# Altium PCB Gimbal19_V1.PcbDoc
Units mil, origin at the board's own origin, x right, y up, seen from the top; angles counter-clockwise.
Board outline 2480.31 x 1968.5 mil, 2 copper layers (Top Layer, Bottom Layer); 67 components, 35 nets, 217 pads, 40 vias.
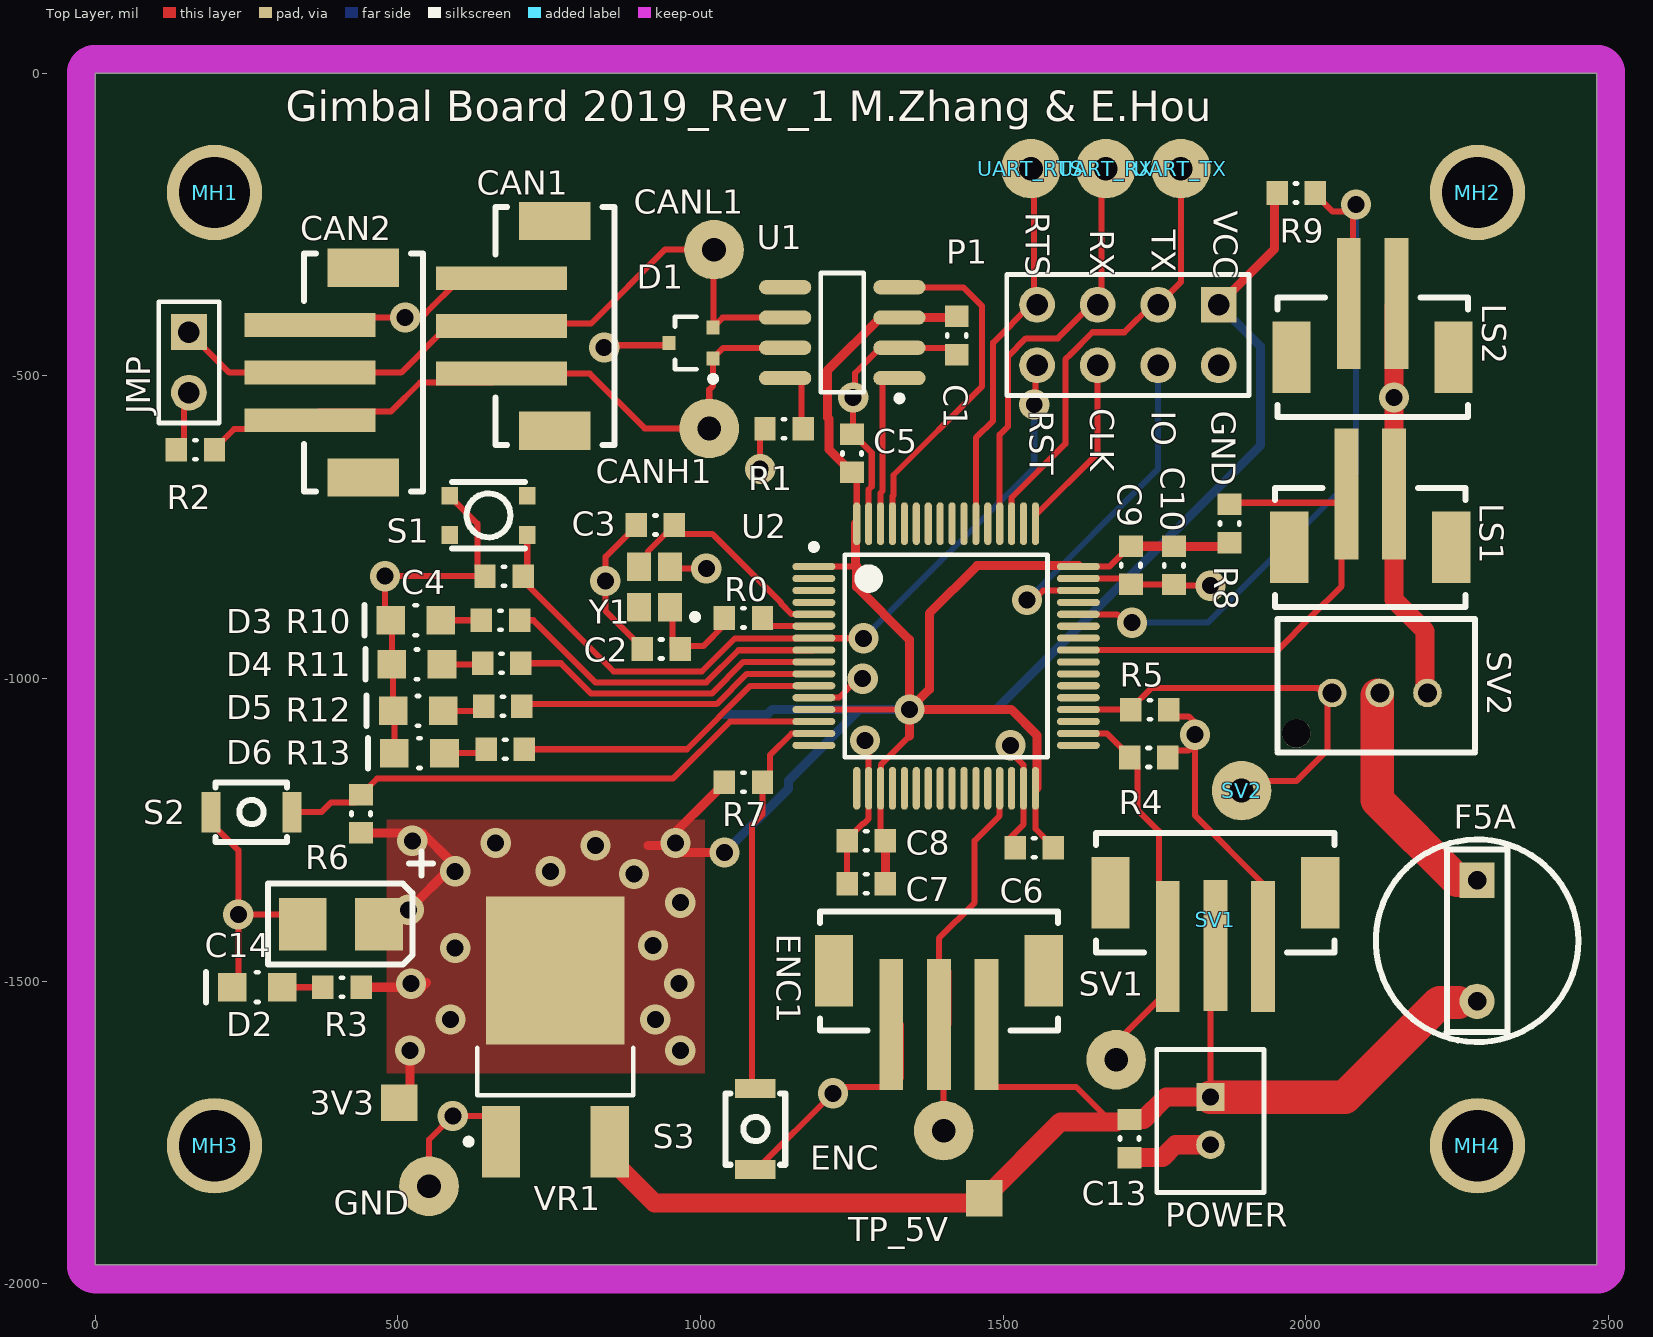
[diagram p0: Top Layer view]
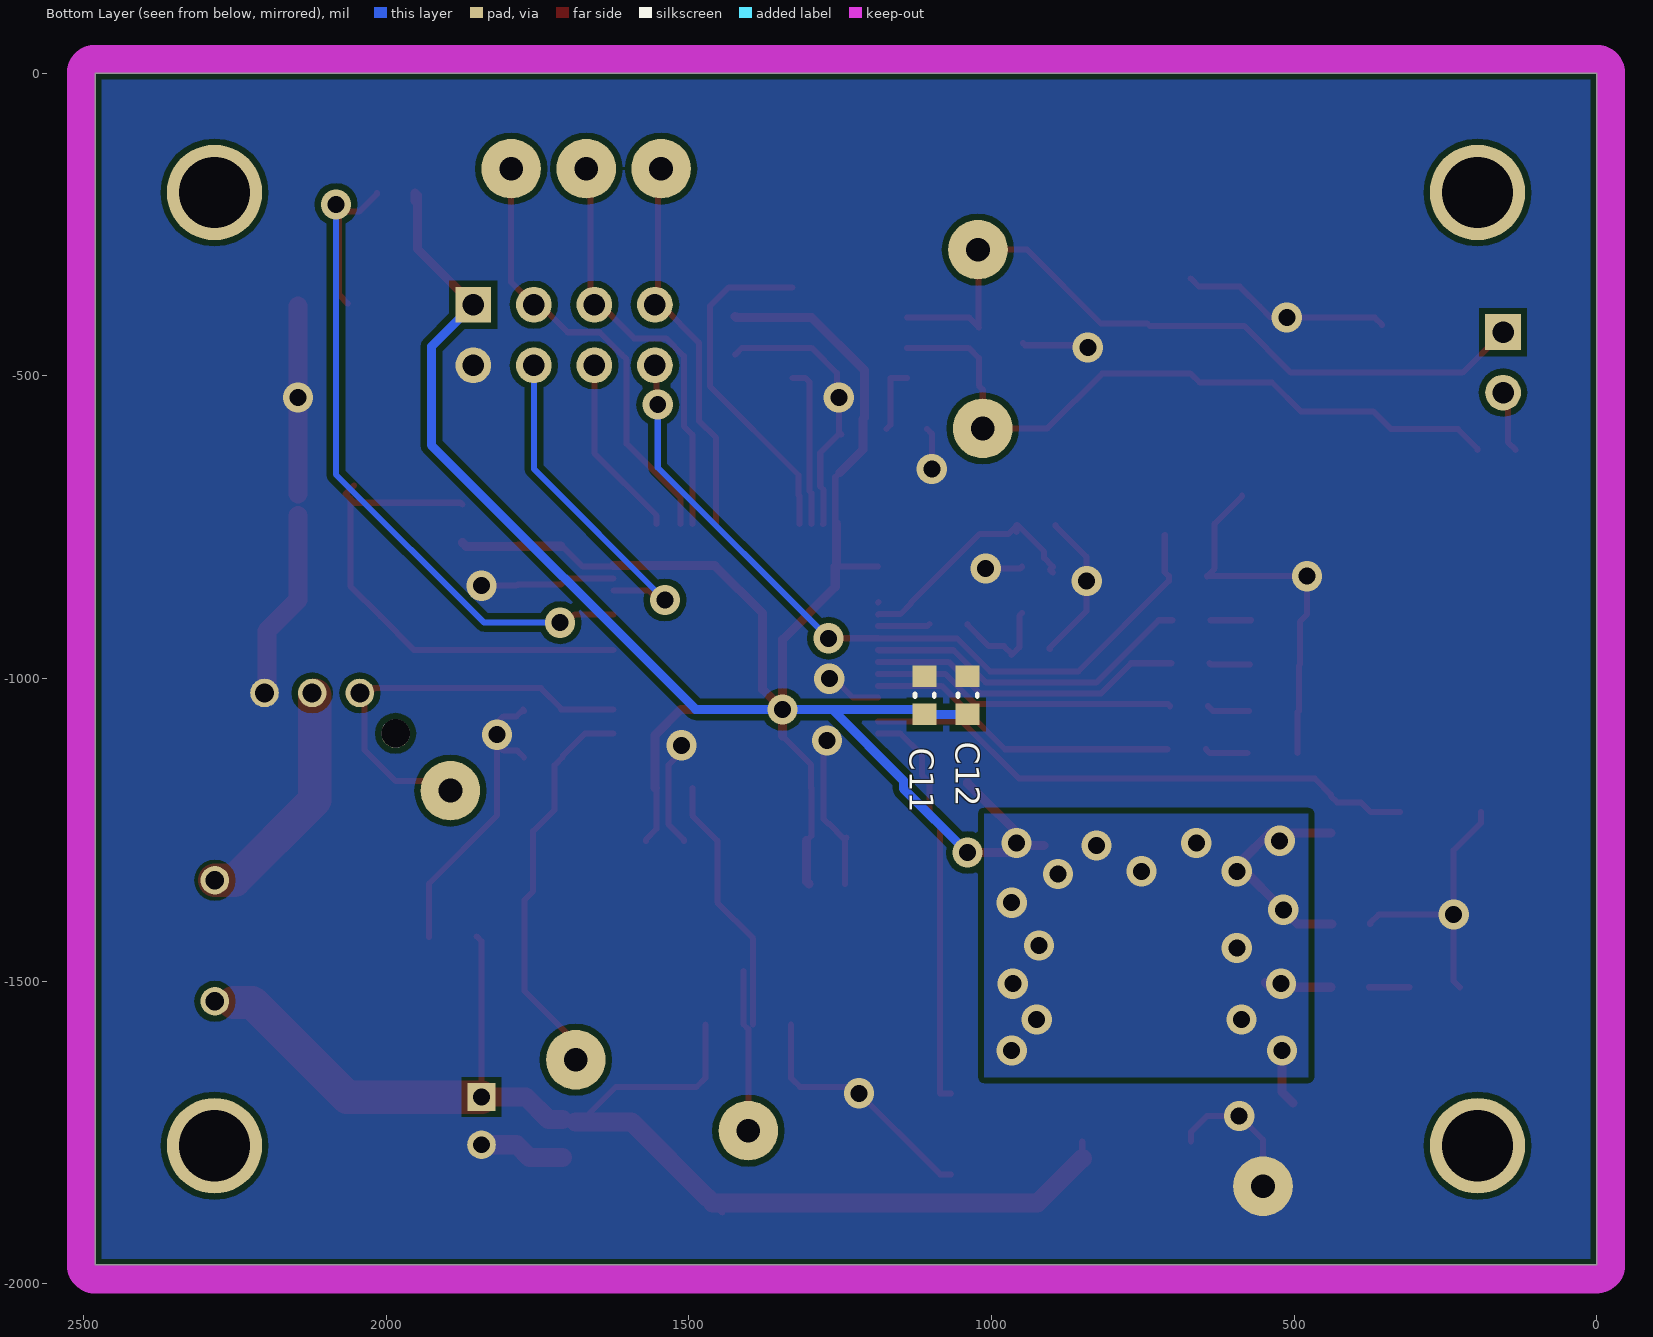
[diagram p1: Bottom Layer view, seen from below]

## Layer stack, top to bottom
Top Solder: solder mask 0.4, Solder Resist, Dk 3.5
Top Layer: signal copper 1.4
Dielectric 1: dielectric 12.6, FR-4, Dk 4.8
Bottom Layer: signal copper 1.4
Bottom Solder: solder mask 0.4, Solder Resist, Dk 3.5

## Board outline
0,-1968.5 0,0 2480.31,0 2480.31,-1968.5

## Design rules (kind name [scope] priority, off if disabled: settings)
Clearance Clearance_1 [All] p1: gap=10 ignorepadtopadclearanceinfootprint=TRUE except(0: Arc-Hole Track-Hole SMDPad-Hole THPad-Hole Via-Hole Fill-Hole Poly-Hole Region-Hole Text-Hole; 8: Arc-Arc Arc-Track Arc-SMDPad Track-Track Track-SMDPad)
HoleSize [All] p1: absolutevalues=TRUE maxlimit=137.8 minlimit=1 maxpercent=80.000 minpercent=20.000
PolygonConnect [All] p1: connectstyle=Direct reliefconductorwidth=10 reliefentries=4 polygonreliefangle="90 Angle" airgapwidth=10
RoutingVias [All] p1: holewidth=16 width=28 viastyle="Through Hole" minholewidth=16 minwidth=28 maxholewidth=28 maxwidth=50
SolderMaskExpansion [All] p1: expansion=4
Width [All] p1: maxlimit=59.06 minlimit=10 preferedwidth=10
29 further rules are at their usual default settings.

## Classes and differential pairs
component class support: D3 D4 D5 D6 ENC MH1 MH2 MH3 MH4 R4 R5 R6 R7 R8 R9 R10 R11 R12 R13 S2 S3 SV1 SV2 UART_RTS UART_RX UART_TX
component class power: 3V3 C13 C14 D2 GND R3 TP_5V VR1
component class mcu: C2 C3 C4 C5 C6 C7 C8 C9 C10 C11 C12 R0 S1 U2 Y1
component class connectors: CAN1 CAN2 ENC1 F5A LS1 LS2 P1 POWER SV1 SV2
component class can: C1 CANH1 CANL1 D1 JMP R1 R2 U1

## Components (designator, comment, footprint, x,y, rotation, side; value= is the part's Value field where it differs from the comment)
3V3 "*" TESTPOINT 501.97,-1700.79 r90 top
C1 "CAP_0.1uF_16V_0603" CAPC0603(1608)55_N 1423.12,-433.07 r90 top value=0.1uF
C2 "CAP_15pF_0603" CAPC0603(1608)55_N 935.04,-951.12 r0 top value=15pF
C3 "CAP_15pF_0603" CAPC0603(1608)55_N 925.2,-746.06 r0 top value=15pF
C4 "CAP_0.1uF_16V_0603" CAPC0603(1608)55_N 675.2,-830.88 r0 top value=0.1uF
C5 "CAP_0.1uF_16V_0603" CAPC0603(1608)55_N 1250,-627.79 r90 top value=0.1uF
C6 "CAP_0.1uF_16V_0603" CAPC0603(1608)55_N 1551.18,-1279.53 r180 top value=0.1uF
C7 "CAP_0.1uF_16V_0603" CAPC0603(1608)55_N 1273.62,-1338.92 r180 top value=0.1uF
C8 "CAP_4.7uF_0603" CAPC0603(1608)55_N 1273.62,-1267.88 r0 top value=4.7uF
C9 "CAP_0.1uF_16V_0603" CAPC0603(1608)55_N 1710.83,-812.76 r270 top value=0.1uF
C10 "CAP_4.7uF_0603" CAPC0603(1608)55_N 1781.86,-812.99 r90 top value=4.7uF
C11 "CAP_10nF_0603" CAPC0603(1608)55_N 1110.24,-1027.56 r270 bottom value=10nF
C12 "CAP_1uF_16V_0603" CAPC0603(1608)55_N 1039.2,-1027.56 r270 bottom value=1uF
C13 "CAP_0.33uF_16V_0603" CAPC0603(1608)55_N 1708.66,-1759.84 r90 top value=0.33uF
C14 "CAP_10uF_1411_POL" AVX-CAPC3528_V 405.51,-1405.51 r180 top value=10uF
CAN1 "CON_3M" JST-B3B-SM4-TB#1 857.66,-417.32 r90 top
CAN2 "CON_3M" JST-B3B-SM4-TB#1 541.34,-494.33 r90 top
CANH1 "TESTPOINT_LOOP" TESTPOINT_LOOP#1 1014.22,-586.61 r270 top
CANL1 "TESTPOINT_LOOP" TESTPOINT_LOOP#1 1022.13,-291.34 r270 top
D1 "TVS_DIODE_CAN" NXP-SOT323-3 984.25,-445.61 r180 top
D2 "DIO_LED_R" LED_0805_LINE 267.55,-1509.84 r180 top
D3 "DIO_LED_Y" LED_0805_LINE 529.36,-903.54 r180 top
D4 "DIO_LED_G" LED_0805_LINE 531.3,-976.38 r180 top
D5 "DIO_LED_G" LED_0805_LINE 533.3,-1053.15 r180 top
D6 "DIO_LED_G" LED_0805_LINE 535.43,-1123.16 r180 top
ENC "TESTPOINT_LOOP" TESTPOINT_LOOP#1 1401.57,-1746.86 r0 top
ENC1 "CON_3M" JST-B3B-SM4-TB#1 1393.7,-1384.36 r180 top
F5A "FUSE" FUSE 2282.79,-1433.07 r270 top
GND "TESTPOINT_LOOP" TESTPOINT_LOOP#1 551.18,-1838.58 r0 top
JMP "Header 2" HDR1X2 154.63,-427.48 r270 top (schematic designator 1)
LS1 "CON_2M" JST-B2B-SM4-TB 2106.3,-881.72 r0 top
LS2 "CON_2M" JST-B2B-SM4-TB 2110.24,-567.51 r0 top
MH1 "MOUNTING_HOLES" MOUNTING_HOLE#1 127.95,-163.39 r0 top
MH2 "MOUNTING_HOLES" MOUNTING_HOLE#2 2598.43,0 r0 top
MH3 "MOUNTING_HOLES" MOUNTING_HOLE#3 125.98,-1818.9 r0 top
MH4 "MOUNTING_HOLES" MOUNTING_HOLE#4 2925.2,0 r0 top
P1 "HEADER 4X2" HEADER_2X4 1855.91,-382.28 r180 top
POWER "CON_2M" JST-B2B-PHSK 1842.29,-1730.67 r270 top
R0 "RES_0R_0603" RESC0603(1608)_N 1070.7,-899.61 r180 top value=0R
R1 "RES_0R_0603" RESC0603(1608)_N 1137.8,-587.29 r180 top value=0R
R2 "RES_120R_0603" RESC0603(1608)_N 165.35,-621.93 r180 top value=120R
R3 "RES_100R_0603" RESC0603(1608)_N 407.48,-1509.84 r0 top value=100R
R4 "RES_10K_0603" RESC0603(1608)_N 1740.35,-1130.29 r180 top value=10K
R5 "RES_10K_0603" RESC0603(1608)_N 1742.13,-1051.35 r180 top value=10K
R6 "RES_10K_0603" RESC0603(1608)_N 438.98,-1223.21 r270 top value=10K
R7 "RES_10K_0603" RESC0603(1608)_N 1070.73,-1171.26 r0 top value=10K
R8 "RES_10K_0603" RESC0603(1608)_N 1874.02,-743.75 r270 top value=10K
R9 "RES_10K_0603" RESC0603(1608)_N 1983.83,-197.6 r180 top value=10K
R10 "RES_100R_0603" RESC0603(1608)_N 669.29,-903.54 r0 top value=100R
R11 "RES_100R_0603" RESC0603(1608)_N 671.26,-974.58 r0 top value=100R
R12 "RES_100R_0603" RESC0603(1608)_N 673.23,-1045.61 r0 top value=100R
R13 "RES_100R_0603" RESC0603(1608)_N 677.17,-1116.64 r0 top value=100R
S1 "SW_PWR" PTS830GM140 649.61,-730.24 r0 top
S2 "SW_TACTILE" B3U-1100P 257.87,-1220.47 r180 top
S3 "SW_TACTILE" B3U-1100P 1090.55,-1744.09 r270 top
SV1 "TESTPOINT_LOOP" TESTPOINT_LOOP#1 1686.55,-1629.63 r90 top
SV1 "CON_3M" JST-B3B-SM4-TB#2 1850.39,-1255.32 r180 top
SV2 "CON_3M" "JST B03B-PASK" 2082.68,-1023.62 r180 top
SV2 "TESTPOINT_LOOP" TESTPOINT_LOOP#2 2057.09,-1694.5 r90 top
TP_5V "*" TESTPOINT 1468.5,-1858.27 r90 top (schematic designator TESTPOINT_5V)
U1 "IC TXRX CAN" LT-S8_N 1233.98,-428.46 r180 top
U2 "STM32F091RC" STM_LQFP64_N 1405.54,-962.6 r0 top
UART_RTS "TESTPOINT_LOOP" TESTPOINT_LOOP#3 1545.67,-151.57 r90 top
UART_RX "TESTPOINT_LOOP" TESTPOINT_LOOP#4 1669.29,-149.61 r90 top
UART_TX "TESTPOINT_LOOP" TESTPOINT_LOOP#1 1793.31,-157.48 r90 top
VR1 "5V0_3V3_LDO" VOLTAGE_REGULATOR 759.84,-1655.12 r0 top
Y1 "CRYSTAL_32MHZ" AVX-CX2520DB32000D0GEJZ1-4_V 923.88,-848.59 r180 top

## Footprints (in the part's own frame and the unit in brackets; to place one, negate y for a bottom-side part, rotate by r counter-clockwise, add the part's x,y. Pads: shape width x height; smd on the part's side, far side on the other; paste and mask are expansions set on the pad)
AVX-CAPC3528_V [mm] "SMT Capacitor, 2 Leads, Body 3.5x2.8mm"
  rect 2x2.2 smd: 1(-1.6,0) 2(1.6,0)
  silkscreen extent -3.87,-3.05 3.05,1.7, body extent -1.79,-1.54 1.8,1.54, height 1.9
AVX-CX2520DB32000D0GEJZ1-4_V [mm] "Hand Drawn, 4-Leads,Body 2.5x2mm"
  rect 1x1.2 smd: 1(-0.65,0.85) 2(-0.65,-0.85) 3(0.65,-0.85) 4(0.65,0.85)
  silkscreen extent -1.83,1.13 -1.58,1.38, body extent -1,-1.25 1,1.25, height 0.55
B3U-1100P [mm] "TACTILE SWITCH GREY"
  rect 0.8x1.7 smd: 1(-1.7,0) 2(1.7,0)
  silkscreen extent -1.5,-1.25 1.5,1.25
CAPC0603(1608)55_N [mm] "Chip Capacitor, Body 1.6x0.8mm, Height 0.55mm, IPC Medium Density"
  rect 0.9x1 smd: 1(-0.8,0) 2(0.8,0)
  silkscreen extent -0.05,-0.4 0.05,0.4, body extent -0.87,-0.48 0.88,0.47, height 0.55
FUSE [mm] "FUSE HOLDER RADIAL 250V 6.3A PCB"
  rect 1.48x1.48 / inner round 1.524 / far side round 1.2 hole 0.78: 1(-2.54,0)
  round 1.48 / inner round 1.524 / far side round 1.2 hole 0.78: 2(2.54,0)
  silkscreen extent -4.25,-4.25 4.25,4.25
HDR1X2 [mm] "Connector; Header; 2 Position"
  rect 1.5x1.5 hole 0.9: 1(0,0)
  round 1.5 hole 0.9: 2(2.54,0)
  silkscreen extent -1.27,-1.27 3.81,1.27
HEADER_2X4 [mm]
  rect 1.5x1.5 hole 0.9: 1(0,0)
  round 1.5 hole 0.9: 2(2.54,0) 3(5.08,0) 4(7.62,0) 5(0,2.54) 6(2.54,2.54) 7(5.08,2.54) 8(7.62,2.54)
  silkscreen extent -1.27,-1.27 8.89,3.81
"JST B03B-PASK" [mm] "PA TOP 3A 3POS 2mm Pitch"
  round 1.2 / inner round 1.524 / far side round 1.2 hole 0.8: 1(-3,0) 2(-1,0) 3(1,0)
  round 1.2 hole 1.2: 4(2.5,1.7)
  silkscreen extent -5,-3.1 3.3,2.5
JST-B2B-PHSK [mm]
  rect 1.162x1.162 / inner rect 1.524x1.524 / far side rect 1.162x1.162 hole 0.7: 1(-1,0)
  round 1.2 / inner round 1.524 / far side round 1.2 hole 0.7: 2(1,0)
  silkscreen extent -3,-2.25 3,2.25
JST-B2B-SM4-TB [mm]
  rect 1x5.5 smd: 1(-1,4.75) 2(1,4.75)
  rect 1.6x3 smd: 3(-3.4,2.5) 4(3.4,2.5)
  silkscreen extent -4,0 4,5
JST-B3B-SM4-TB#1 [mm]
  rect 1x5.5 smd: 1(-2,4.75) 2(0,4.75) 3(2,4.75)
  rect 1.6x3 smd: 4(-4.4,2.5) 5(4.4,2.5)
  silkscreen extent -5,0 5,5
JST-B3B-SM4-TB#2 [mm]
  rect 1x5.5 smd: 1(-2,4.75) 2(0,4.715) 3(2,4.75)
  rect 1.6x3 smd: 4(-4.4,2.5) 5(4.4,2.5)
  silkscreen extent -5,0 5,5
LED_0805_LINE [mm] "SMD, 2-Leads, Body 2x1.25mm"
  rect 1.2x1.2 smd: 1(-1.05,0) 2(1.05,0)
  silkscreen extent -0.05,-0.63 2.16,0.64, body extent -1,-0.63 1,0.63, height 0.8
LT-S8_N [mm] "SOP, 8-Leads, Body 4.9x3.9mm, Pitch 1.27mm, IPC Medium Density"
  oval 2.2x0.6 smd: 1(-2.4,1.905) 2(-2.4,0.635) 3(-2.4,-0.635) 4(-2.4,-1.905) 5(2.4,-1.905) 6(2.4,-0.635) 7(2.4,0.635) 8(2.4,1.905)
  silkscreen extent -2.53,-2.5 0.9,2.88, body extent -2,-2.5 2,2.5, height 1.76
MOUNTING_HOLE#1 [mm]
  round 4 hole 3 unplated: 0(1.75,-0.85)
MOUNTING_HOLE#2 [mm]
  round 4 hole 3 unplated: 0(-8,-5)
MOUNTING_HOLE#3 [mm]
  round 4 hole 3 unplated: 0(1.8,1.2)
MOUNTING_HOLE#4 [mm]
  round 4 hole 3 unplated: 0(-16.3,-45)
NXP-SOT323-3 [mm] "SOT23, 3-Leads, Body 2.2x1.35mm, Pitch 0.65mm"
  rect 0.55x0.6 smd paste-1: 1(-0.925,0.65) 2(-0.925,-0.65) 3(0.925,0)
  silkscreen extent -1.05,-1.1 0.67,1.62, body extent -1.15,-1.1 1.15,1.1, height 1.1
PTS830GM140 [mm] "PWR TACTILE SWITCH (RED)"
  rect 0.7x0.75 smd: 1(-1.625,0.825) 2(1.625,0.825) 3(-1.625,-0.825) 4(1.625,-0.825)
  silkscreen extent -1.53,-1.4 1.53,1.4
RESC0603(1608)_N [mm] "Chip Resistor, Body 1.6x0.8mm, IPC Medium Density"
  rect 0.9x1 smd: 1(-0.8,0) 2(0.8,0)
  silkscreen extent -0.05,-0.4 0.05,0.4, body extent -0.85,-0.47 0.85,0.47, height 0.6
STM_LQFP64_N [mm] "Thin QFP, 64-Leads, Body 10x10mm, Pitch 0.5mm, IPC Medium Density"
  oval 1.8x0.3 smd mask+0.05: 1(-5.55,3.75) 2(-5.55,3.25) 3(-5.55,2.75) 4(-5.55,2.25) 5(-5.55,1.75) 6(-5.55,1.25) 7(-5.55,0.75) 8(-5.55,0.25) 9(-5.55,-0.25) 10(-5.55,-0.75) 11(-5.55,-1.25) 12(-5.55,-1.75) 13(-5.55,-2.25) 14(-5.55,-2.75) 15(-5.55,-3.25) 16(-5.55,-3.75) 33(5.55,-3.75) 34(5.55,-3.25) 35(5.55,-2.75) 36(5.55,-2.25) 37(5.55,-1.75) 38(5.55,-1.25) 39(5.55,-0.75) 40(5.55,-0.25) 41(5.55,0.25) 42(5.55,0.75) 43(5.55,1.25) 44(5.55,1.75) 45(5.55,2.25) 46(5.55,2.75) 47(5.55,3.25) 48(5.55,3.75)
  oval 0.3x1.8 smd mask+0.05: 17(-3.75,-5.55) 18(-3.25,-5.55) 19(-2.75,-5.55) 20(-2.25,-5.55) 21(-1.75,-5.55) 22(-1.25,-5.55) 23(-0.75,-5.55) 24(-0.25,-5.55) 25(0.25,-5.55) 26(0.75,-5.55) 27(1.25,-5.55) 28(1.75,-5.55) 29(2.25,-5.55) 30(2.75,-5.55) 31(3.25,-5.55) 32(3.75,-5.55) 49(3.75,5.55) 50(3.25,5.55) 51(2.75,5.55) 52(2.25,5.55) 53(1.75,5.55) 54(1.25,5.55) 55(0.75,5.55) 56(0.25,5.55) 57(-0.25,5.55) 58(-0.75,5.55) 59(-1.25,5.55) 60(-1.75,5.55) 61(-2.25,5.55) 62(-2.75,5.55) 63(-3.25,5.55) 64(-3.75,5.55)
  silkscreen extent -5.67,-4.25 4.25,4.7, body extent -5,-5 5,5, height 1.6
TESTPOINT [mil]
  rect 60x60 smd: 1(0,0)
TESTPOINT_LOOP#1 [mm]
  round 2.5 hole 1: 1(0,0)
TESTPOINT_LOOP#2 [mm]
  round 2.5 hole 1: 1(12.94,4.15)
TESTPOINT_LOOP#3 [mm]
  round 2.5 hole 1: 1(-0.15,0)
TESTPOINT_LOOP#4 [mm]
  round 2.5 hole 1: 1(-0.2,0)
VOLTAGE_REGULATOR [mm] "DPAK, 3-Leads, Body 6.095x6.54mm, Pitch 4.57mm"
  rect 1.6x3 smd: 1(-2.285,-2.79) 3(2.285,-2.79)
  rect 5.8x6.2 smd: 2(0,4.39)
  silkscreen extent -3.76,-2.91 3.27,1.14, body extent -3.27,-0.84 3.27,5.25, height 2.38

## Part data
3V3 TP_5V: "TESTPOINT_SMD"
C1 C4 C5 C6 C7 C9: "CAP CER 0.1UF 16V X7R 0603", Digikey Part Number=311-1088-1-ND, Manufacturer=Yageo, MPN=CC0603KRX7R7BB104, Package="0603 (1608 Metric)", Temperature Coefficient=X7R, Voltage Rating=16V, Dimensions="0.063\" L x 0.031\" W (1.60mm x 0.80mm)"
C2 C3: "CAP CER 15PF 250V NPO 0603", Digikey Part Number=311-3282-1-ND, Manufacturer=Yageo, MPN=AC0603JRNPOYBN150, Package="0603 (1608 Metric)", Temperature Coefficient=NP0, Voltage Rating=250v, Dimensions="0.063\" L x 0.031\" W (1.60mm x 0.80mm)"
C8 C10: "CAP CER 4.7UF 6.3V X5R 0603", Digikey Part Number=311-1521-1-ND, Manufacturer=Yageo, MPN=CC0603KRX5R5BB475, Package="0603 (1608 Metric)", Temperature Coefficient=X5R, Voltage Rating=6.3V, Dimensions="0.063\" L x 0.031\" W (1.60mm x 0.80mm)"
C11: "CAP CER 10000PF 16V X7R 0603", Digikey Part Number=311-3369-1-ND, Manufacturer=Yageo, MPN=CC0603KRX7R7BB103, Package="0603 (1608 Metric)", Temperature Coefficient=X7R, Voltage Rating=16V, Dimensions="0.063\" L x 0.031\" W (1.60mm x 0.80mm)"
C12: "CAP CER 1UF 16V Y5V 0603", Digikey Part Number=311-1372-1-ND, Manufacturer=Yageo, MPN=CC0603ZRY5V7BB105, Package="0603 (1608 Metric)", Temperature Coefficient=Y5V, Voltage Rating=16V, Dimensions="0.063\" L x 0.031\" W (1.60mm x 0.80mm)"
C13: "CAP CER 0.33UF 16V X7R 0603", Digikey Part Number=490-6050-1-ND, Manufacturer="Murata Electronics North America", MPN=GCM188R71C334KA37D, Package="0603 (1608 Metric)", Temperature Coefficient=X7R, Voltage Rating=16V, Dimensions="0.063\" L x 0.031\" W (1.60mm x 0.80mm)"
C14: "CAP TANT 10UF 20% 10V 1411", Digikey Part Number=478-12047-1-ND, Manufacturer="AVX Corporation", MPN=F971A106MBAHT3, Package="1411 (3528 Metric)", Voltage Rating=10V, Dimensions="0.063\" L x 0.031\" W (1.60mm x 0.80mm)"
D1: "TVS DIODE 24V 41V SOT323-3", Digikey Part Number=1727-3891-1-ND, Manufacturer="Nexperia USA Inc.", MPN=PESD2CAN,215, Package="SC-70, SOT-323", ComponentLink1Description=Datasheet, ComponentLink1URL=https://assets.nexperia.com/documents/data-sheet/PESD1CAN-U.pdf
D2: "LED RED DIFFUSED 0805 SMD", Digikey Part Number=475-1278-1-ND, Forward Voltage Drop=2V, Manufacturer=OSRAM, MPN="LS R976-NR-1", Package="0805 (2012 Metric)"
D3: "LED YELLOW DIFFUSED 0805 SMD", Digikey Part Number=475-2560-1-ND, Forward Voltage Drop=2.2V, Manufacturer=OSRAM, MPN="LY R976-PS-36", Package="0805 (2012 Metric)"
D4 D5 D6: "LED GREEN DIFFUSED 0805 SMD", Digikey Part Number=475-1410-1-ND, Forward Voltage Drop=2.2V, Manufacturer=OSRAM, MPN="LG R971-KN-1", Package="0805 (2012 Metric)"
F5A: library part FUSE-5A, "FUSE HOLDER RADIAL 250V 6.3A PCB"
JMP: "Header, 2-Pin", LatestRevisionDate=17-Jul-2002, LatestRevisionNote="Re-released for DXP Platform.", Publisher="Altium Limited"
MH1 MH2 MH3 MH4: "6cm x 6cm"
P1: "Header, 4-Pin Dual row", Digikey Part Number=S9015E-04-ND, Manufacturer="Sullins Connector Solutions", MPN=GRPB042VWVN-RC
R0 R1: "RES SMD 0 OHM JUMPER 1/10W 0603", Digikey Part Number=311-0.0GRCT-ND, Manufacturer=Yageo, MPN=RC0603JR-070RL, Package="0603 (1608 Metric)", Dimensions="0.063\" L x 0.031\" W (1.60mm x 0.80mm)"
R2: "RES SMD 120 OHM 5% 1/10W 0603", Digikey Part Number=311-120GRCT-ND, Manufacturer=Yageo, MPN=RC0603JR-07120RL, Package="0603 (1608 Metric)", Tolerance=5%, Dimensions="0.063\" L x 0.031\" W (1.60mm x 0.80mm)"
R3 R10 R11 R12 R13: "RES SMD 100 OHM 1% 1/10W 0603", Digikey Part Number=311-100HRCT-ND, Manufacturer=Yageo, MPN=RC0603FR-07100RL, Package="0603 (1608 Metric)", Tolerance=1%, Dimensions="0.063\" L x 0.031\" W (1.60mm x 0.80mm)"
R4 R5 R6 R7 R8 R9: "RES SMD 10K OHM 5% 1/10W 0603", Digikey Part Number=311-10KGRCT-ND, Manufacturer=Yageo, MPN=RC0603JR-0710KL, Package="0603 (1608 Metric)", Tolerance=5%, Dimensions="0.063\" L x 0.031\" W (1.60mm x 0.80mm)"
S1: "Power Switch (Red)", Digikey Part Number=CKN10587CT-ND, Manufacturer=C&K, MPN="PTS830GM140 SMTR LFS", ComponentLink1Description=Datasheet, ComponentLink1URL=https://www.ckswitches.com/media/1478/pts830.pdf
S2 S3: "Tactile Switch (Grey)", Digikey Part Number=SW1021TR-ND, Manufacturer="Omron Electronics Inc-EMC Div", MPN=B3U-1100P
U1: library part LTC2875, "IC TXRX CAN 4MBPS 8SO", Digikey Part Number=LTC2875IS8#PBF-ND, Manufacturer="Linear Technologies", MPN=LTC2875IS8#PBF, Package="8-SOIC (0.154\", 3.90mm Width)", ComponentLink1Description=Datasheet, ComponentLink1URL=https://www.analog.com/media/en/technical-documentation/data-sheets/2875f.pdf
U2: Digikey Part Number=497-15167-ND, Manufacturer=STMicroelectronics, Package=64-LQFP, ComponentLink1Description=Datasheet, ComponentLink1URL=https://www.st.com/content/ccc/resource/technical/document/datasheet/95/3c/2e/5b/21/09/45/a6/DM00115237.pdf/files/DM00115237.pdf/jcr:content/translations/en.DM00115237.pdf#%5B%7B%22num%22%3A96%2C%22gen%22%3A0%7D%2C%7B%22name%22%3A%22XYZ%22%7D%2C67%2C755%2Cnull%5D, MPN=STM32F091RC
VR1: "IC REG LINEAR 3.3V 1A DPAK", Current Output=1A, Digikey Part Number=NCP1117DT33T5GOSCT-ND, Manufacturer="ON Semiconductor", MPN=NCP1117DT33T5G
Y1: "CRYSTAL 32MHZ 8PF SMD", Digikey Part Number=1253-1730-1-ND, Manufacturer="Kyocera International Inc. Electronic Components", MPN=CX2520DB32000D0GPSC1, Package="4-SMD, No Lead", Dimensions="0.098\" L x 0.079\" W (2.50mm x 2.00mm)"

## Via types
v1: diameter 50, hole 28, Top Layer to Bottom Layer, 40 vias

## Nets (pads, with @x,y where several pads share a name; then routed paths per layer and width w, separated by ;. In a path a pad name is that pad's centre, name@x,y a point inside that pad or via, vN(x,y) a via of type N, cw(c..) or ccw(c..) an arc to the next point about the centre after c; other vN are vias at no path point)
+3V3: 3V3.1 C1.2 C5.1 C6.1 C7.1 C8.2 C9.1 C10.2 C11.2 C12.2 C14.1 P1.1 R3.2 R6.2 R7.1 R8.2 R9.2 U1.3 U2.1 U2.13 U2.19 U2.32 U2.48 U2.64 VR1.2 | length 5264.7
  Top Layer w10: U2.13 1187.21,-1051.01 1344.83,-1051.01 v1(1345,-1050.83) ; U2.1 1257.9,-814.96 ; C5.1 1257.9,-667.18 U2.64 ; C8.2 1297.27,-1260.04 U2.19 1297.62,-1180.76 1297.62,-1142.49 1345,-1095.11 ; U2.32 1553.18,-1248.23 1570.87,-1265.92 C6.1@1570.87,-1267.88 ; U2.48 1675.16,-814.96 1708.86,-781.26 C9.1
  Top Layer w15: C14.1@437.01,-1405.51 494.09,-1405.51 v1(517.72,-1381.89) 588.38,-1311.23 588.38,-1302.94 540.14,-1254.7 R6.2 ; R3.2 539.37,-1509.84 547.24,-1501.97 ; 3V3.1 519.69,-1683.07 v1(519.69,-1614.17) ; 913.39,-1275.59 936.87,-1275.59 1039.23,-1173.23 R7.1 ; v1@964.57,-1287.4 v1(1039.37,-1287.4) v1@1039.37,-1276.58 ; C5.1 1211.97,-621.25 1211.97,-570.79 1209.47,-568.29 1209.47,-490.96 1296.97,-403.46 U1.3 1421.23,-403.46 C1.2 ; U2.64@1256.18,-744.09 1256.18,-813.24 1257.9,-814.96 1257.9,-848.45 1345,-935.56 v1(1345,-1050.83) ; C7.1@1301.18,-1338.92 1305.12,-1334.98 C8.2 ; 1345,-1095.11 v1(1345,-1050.83) ; U2.32@1554.9,-1181.1 1555.75,-1180.25 1555.75,-1093.67 1512.91,-1050.83 v1(1345,-1050.83) ; U2.48@1624.05,-813.24 1456.82,-813.24 1377.95,-892.11 1377.95,-1017.89 v1(1345,-1050.83) ; C9.1 1781.62,-781.26 C10.2 1867.76,-781.5 R8.2 ; P1.1 1948.4,-289.79 1948.4,-201.54 R9.2 R9.2@1952.33,-211.05
  Bottom Layer w15: C12.2 C11.2 1118.46,-1050.83 1262.67,-1050.83 ; v1(1039.37,-1287.4) 1145.15,-1181.62 1145.15,-1168.36 1262.67,-1050.83 ; P1.1 1925.2,-451.57 1925.2,-614.17 1488.54,-1050.83 v1(1345,-1050.83) 1262.67,-1050.83
  other v1: 966.54,-1614.17 586.61,-1562.99 925.2,-1562.99 521.65,-1503.94 964.57,-1503.94 594.49,-1444.88 921.26,-1440.94 966.54,-1370.08 889.76,-1322.83 594.49,-1318.37 751.97,-1318.37 826.15,-1275.59 661.42,-1271.65 958.66,-1271.65 523.62,-1267.88
+5V: C13.2 ENC1.1 F5A.2 POWER.1 SV1.2 TP_5V.1 VR1.3 | length 2190.1
  Top Layer w10: VR1.3@849.8,-1792.52 VR1.3 ; TP_5V.1@1444.53,-1882.24 1460.63,-1866.14 TP_5V.1 ; ENC1.1 1472.44,-1659.95 1487.13,-1674.64 1620.27,-1674.64 1677.91,-1732.28 ; POWER.1 1842.29,-1433.88 SV1.2@1850.39,-1425.78
  Top Layer w31.5: VR1.3@849.8,-1792.52 923.43,-1866.14 TP_5V.1@1460.63,-1866.14 ; TP_5V.1 1594.49,-1732.28 1677.91,-1732.28 1687.38,-1732.28 ; C13.2 1731.62,-1728.35 1768.66,-1691.3 POWER.1
  Top Layer w55.12: POWER.1 2064.61,-1691.3 2220.87,-1535.04 2251.97,-1535.04
CAN_H: CAN1.1 CAN2.1 CANH1.1 D1.1 R2.1 U1.7 | length 1153
  Top Layer w10: R2.1 196.85,-619.97 229.07,-587.75 339.65,-587.75 CAN2.1 369.02,-558.38 488.67,-558.38 536.31,-510.75 655.96,-510.75 CAN1.1 816.93,-496.06 907.48,-586.61 CANH1.1 1014.22,-522.4 1020.67,-515.95 D1.1 1020.67,-470.22 1037.42,-453.46 U1.7
CAN_L: CAN1.2 CAN2.2 CANL1.1 D1.2 JMP.1 U1.6 | length 1232.8
  Top Layer w10: JMP.1 221.48,-494.33 CAN2.2 505.06,-494.33 582.06,-417.32 CAN1.2 738.19,-417.32 742.13,-413.39 818.9,-413.39 940.94,-291.34 CANL1.1 1021.4,-292.07 D1.2@1021.4,-418.3 ; D1.2 1021.4,-419.29 D1.2@1021.4,-418.3 ; U1.6 1036.24,-403.46 D1.2@1021.4,-418.3
GND: C1.1 C2.1 C3.1 C4.1 C5.2 C6.2 C7.2 C8.1 C9.2 C10.1 C11.1 C12.1 C13.1 C14.2 CAN1.3 CAN2.3 D1.3 D2.2 D3.2 D4.2 D5.2 D6.2 ENC1.3 GND.1 LS1.2 LS2.2 P1.5 POWER.2 R1.2 R4.1 R5.1 S1.1 S2.2 S3.2 SV1.1@1929.13,-1442.33 SV2.1@2200.79,-1023.62 U1.2 U2.12 U2.18 U2.31 U2.47 U2.63 VR1.1 Y1.2 | length 5087.3
  Top Layer w10: S2.2 190.94,-1238.19 236.22,-1283.46 v1(236.22,-1389.76) ; D2.2 236.22,-1499.83 v1(236.22,-1389.76) ; CAN2.3 366.45,-403.46 v1(511.81,-403.46) 538.17,-403.46 556.99,-384.64 589.36,-352.27 656.96,-352.27 CAN1.3 ; C14.2@374.02,-1405.51 374.02,-1403.54 360.24,-1389.76 v1(236.22,-1389.76) ; D6.2 494.09,-1055.29 D5.2 491.96,-978.38 D4.2 489.96,-905.48 D3.2 478.35,-893.87 v1(478.35,-830.71) C4.1@643.53,-830.71 ; GND.1@551.18,-1858.27 GND.1 551.18,-1761.81 v1(590.55,-1722.44) 643.39,-1722.44 669.88,-1748.94 VR1.1 ; S1.1 585.63,-698.74 630.98,-744.09 630.98,-818.16 C4.1@643.53,-830.71 ; C4.1 C4.1@643.53,-830.71 ; v1(840.55,-452.76) 844.12,-449.18 944.26,-449.18 D1.3 ; C3.1 893.7,-748.03 843.15,-798.58 843.15,-837.95 v1(842.52,-838.58) 842.52,-888.13 903.54,-949.15 C2.1 ; Y1.2 952.5,-818.16 v1(1009.42,-818.16) ; S3.2@1066.93,-1818.9 1084.65,-1818.9 1228.9,-1674.64 1316.02,-1674.64 1330.71,-1659.95 ENC1.3@1330.71,-1571.37 ; R1.2 1098.43,-595.17 1098.43,-643.98 v1@1107.99,-653.54 ; U2.12 1187.38,-1031.15 1228.69,-1031.15 1259.84,-1000 v1(1267.72,-1000) ; C8.1@1239,-1262.79 C8.1@1242.13,-1265.92 ; C7.2 C8.1@1242.13,-1265.92 ; C8.1 C8.1@1242.13,-1265.92 ; v1(1271.65,-1102.36) 1277.24,-1107.95 1277.24,-1180.76 U2.18 1277.59,-1231.54 1270.07,-1239.06 1268.98,-1239.06 C8.1@1242.13,-1265.92 ; U2.63@1277.93,-744.44 U2.63 1277.59,-687.48 1282.69,-682.38 1282.69,-627.01 1251.97,-596.29 C5.2 1248.03,-596.29 1251.97,-592.35 v1(1251.97,-535.43) 1255,-532.4 1255,-495.43 1296.97,-453.46 U1.2 1412.02,-453.46 C1.1 ; C6.2@1507.87,-1267.88 1507.87,-1265.92 1533.49,-1240.3 U2.31 1533.15,-1180.76 1533.15,-1142.4 1511.81,-1121.06 v1(1511.81,-1110.23) ; U2.47 1701.22,-834.65 C9.2 1711.06,-844.49 C10.1 1782.1,-844.25 1784.3,-846.46 v1(1842.52,-846.46) ; R4.1 1783.3,-1118.84 1806.36,-1118.84 v1@1816.93,-1108.27 ; R5.1@1771.85,-1053.12 R5.1 1784.54,-1062.27 1806.36,-1062.27 1816.93,-1072.83 v1(1816.93,-1092.52) v1@1816.93,-1108.27 ; SV1.1@1929.13,-1427.17 1929.13,-1338.58 1816.93,-1226.38 v1@1816.93,-1108.27 ; LS2.2@2141.73,-380.5 LS2.2@2145.67,-384.44
  Top Layer w31.5: C13.1 1763.11,-1791.34 1784.41,-1770.04 POWER.2 ; LS1.2@2145.67,-730.29 2145.67,-870.08 2196.85,-921.26 SV2.1@2196.85,-1011.81 ; LS1.2 v1(2145.67,-535.43) LS2.2@2145.67,-384.44
  other v1: 1218.5,-1685.04 1098.43,-653.54
Net1_2: JMP.2 R2.2 | length 103.1
  Top Layer w10: R2.2 146.57,-609.22 146.57,-535.53 JMP.2
NetC2_2: C2.2 R0.2 Y1.1 | length 172.4
  Top Layer w10: Y1.1@949.47,-891.9 953.82,-896.25 953.82,-948.25 966.54,-960.96 966.54,-959 979.25,-946.28 1004.34,-946.28 1039.2,-911.42 R0.2@1039.2,-909.45
NetC3_2: C3.2 U2.5 Y1.3 | length 393.7
  Top Layer w10: Y1.3@898.29,-824.97 Y1.3@903.21,-820.05 ; Y1.3 912.97,-800.44 912.97,-789.93 956.84,-746.06 C3.2@958.66,-746.06 ; C3.2@958.66,-757.87 C3.2@958.66,-755.91 ; C3.2@958.66,-748.03 971.38,-760.75 1019.12,-760.75 1132.91,-874.54 1132.91,-876.15 1150.11,-893.35 1186.69,-893.35 U2.5
NetD2_1: D2.1 R3.1 | length 67.1
  Top Layer w10: D2.1 R3.1
NetD3_1: D3.1 R10.1 | length 67.1
  Top Layer w10: D3.1 R10.1
NetD4_1: D4.1 R11.1 | length 67.9
  Top Layer w10: D4.1 637.96,-976.38 R11.1
NetD5_1: D5.1 R12.1 | length 70.2
  Top Layer w10: D5.1 634.19,-1053.15 R12.1
NetD6_1: D6.1 R13.1 | length 71.6
  Top Layer w10: D6.1 639.15,-1123.16 R13.1
NetENC1_2: ENC1.2 ENC.1 U2.29 | length 699.2
  Top Layer w10: ENC1.2 1393.7,-1429.13 1452.76,-1370.08 1452.76,-1267.75 1494.12,-1226.38 U2.29 ; ENC.1 1401.57,-1579.24 1409.45,-1571.37 ENC1.2@1409.45,-1482.78
NetF5A_1: F5A.1 SV2.2 | length 392.9
  Top Layer w55.12: SV2.2@2118.11,-1027.56 2118.11,-1201.18 2250,-1333.07 F5A.1
NetLS1_1: LS1.1 R8.1 U2.41 | length 842.7
  Top Layer w10: U2.41 1953.42,-952.76 2009.06,-897.11 2059.06,-847.12 LS1.1@2059.06,-702.59 ; R8.1 1876.87,-709.4 2052.24,-709.4 LS1.1@2059.06,-702.59 ; LS1.1@2053.32,-681.1 LS1.1 LS1.1@2059.06,-702.59
NetLS2_1: LS2.1 R9.1 U2.44 | length 1263.2
  Top Layer w10: U2.44 1687.99,-893.7 1701.77,-907.48 v1(1712.6,-907.48) ; R9.1 2015.32,-199.57 2044.1,-228.35 2070.87,-228.35 v1@2077.68,-221.54 ; LS2.1@2062.99,-380.5 2077.68,-365.82 v1@2077.68,-221.54 ; v1(2082.68,-216.54) v1@2077.68,-221.54
  Bottom Layer w10: v1(1712.6,-907.48) 1838.06,-907.48 2082.68,-662.87 v1(2082.68,-216.54)
NetP1_2: P1.2 U2.51 UART_TX.1 | length 729
  Top Layer w10: U2.51 1513.81,-700.76 1602.57,-612 1602.57,-472.65 1611.38,-463.84 1647.46,-427.75 1700.2,-427.75 P1.2@1745.67,-382.28 ; P1.2 1793.31,-344.88 UART_TX.1
NetP1_3: P1.3 U2.52 UART_RX.1 | length 693.7
  Top Layer w10: U2.52 1494.12,-596.8 1507.87,-583.05 1507.87,-467.34 1537.46,-437.76 1590.2,-437.76 P1.3@1645.67,-382.28 ; P1.3 1662.6,-375.59 1662.6,-156.3 UART_RX.1@1669.29,-149.61
NetP1_4: P1.4 U2.54 UART_RTS.1 | length 634.4
  Top Layer w10: U2.54 1454.75,-602.33 1483.14,-573.94 1483.14,-444.81 P1.4@1545.67,-382.28 ; UART_RTS.1@1545.67,-151.57 1550.79,-156.69 1550.79,-377.17 P1.4
NetP1_6: P1.6 U2.46 | length 568.7
  Top Layer w10: v1(1539.37,-870.08) 1550.19,-870.08 1565.94,-854.33 U2.46
  Bottom Layer w10: v1(1539.37,-870.08) 1755.91,-653.54 P1.6
NetP1_7: P1.7 U2.49 | length 304.4
  Top Layer w10: U2.49 1553.18,-730.29 1655.91,-627.56 P1.7
NetR0_1: R0.1 U2.6 | length 86.4
  Top Layer w10: R0.1@1102.19,-909.45 1106.13,-913.39 U2.6
NetR1_1: R1.1 U1.8 | length 113.9
  Top Layer w10: U1.8 1166.94,-503.46 1166.94,-581 R1.1@1173.23,-587.29
NetR4_2: R4.2 SV1.1@1686.55,-1629.63 SV1.3 U2.34 | length 663
  Top Layer w10: U2.34 1624.39,-1090.9 1671.44,-1090.9 1708.86,-1128.32 R4.2 1721.57,-1143 1721.57,-1216.74 1756.97,-1252.13 1756.97,-1351.46 1771.65,-1366.14 SV1.3 1771.65,-1515.75 1686.55,-1600.85 SV1.1@1686.55,-1629.63
NetR5_2: R5.2 SV2.1@1893.7,-1185.04 SV2.3 U2.36 | length 686.7
  Top Layer w10: U2.36 1710.46,-1051.18 R5.2 1710.63,-1049.38 1744.26,-1015.75 2019.69,-1015.75 2035.43,-1031.5 2035.43,-1118.11 1984.25,-1169.29 1933.07,-1169.29 1925.19,-1177.17 SV2.1@1893.7,-1177.17
NetR6_1: R6.1 S2.1 U2.14 | length 923.3
  Top Layer w10: S2.1 373.41,-1220.47 389.45,-1204.43 428.52,-1204.43 R6.1@438.98,-1193.98 ; R6.1 465.34,-1165.35 954.19,-1165.35 1048.67,-1070.87 U2.14
NetR7_2: R7.2 S3.1 U2.15 | length 676
  Top Layer w10: S3.1@1066.93,-1685.04 1084.65,-1685.04 1084.65,-1242.13 1102.22,-1224.55 R7.2 1114.94,-1158.54 1114.94,-1126.07 1150.11,-1090.9 1186.69,-1090.9 U2.15
NetR10_2: R10.2 U2.8 | length 550.9
  Top Layer w10: R10.2 723.5,-903.54 826.15,-1006.19 1009.42,-1006.19 1062.51,-953.1 1186.69,-953.1 U2.8
NetR11_2: R11.2 U2.9 | length 526.3
  Top Layer w10: R11.2 769.08,-974.58 818.69,-1024.19 1018.98,-1024.19 1070.73,-972.44 U2.9
NetR12_2: R12.2 U2.10 | length 504.5
  Top Layer w10: R12.2 708.15,-1042.19 1026.44,-1042.19 1076.5,-992.13 U2.10
NetR13_2: R13.2 U2.11 | length 521.8
  Top Layer w10: R13.2 977.44,-1116.64 1082.27,-1011.81 U2.11
NetU1_1: U1.1 U2.62 | length 266.1
  Top Layer w10: U2.62 1297.27,-693.25 1300.69,-689.84 1300.69,-509.76 1306.98,-503.46 U1.1
NetU1_4: U1.4 U2.61 | length 570.5
  Top Layer w10: U2.61 1317.3,-743.75 1317.3,-698.67 1318.69,-697.29 1318.69,-663.6 1465.14,-517.14 1465.14,-384.43 1434.17,-353.46 U1.4
R\S\T\: C4.2 P1.8 S1.4 U2.7 | length 1295.9
  Top Layer w10: S1.4 713.58,-823.99 C4.2 706.69,-838.58 856.3,-988.19 1001.97,-988.19 1056.74,-933.42 1186.69,-933.42 U2.7 1187.21,-933.24 1268.81,-933.24 v1(1268.98,-933.42) ; v1(1551.18,-547.24) 1553.54,-544.88 1553.54,-484.65 P1.8
  Bottom Layer w10: v1(1268.98,-933.42) 1551.18,-651.22 v1(1551.18,-547.24)
pads on no net: CAN1.4 CAN1.5 CAN2.4 CAN2.5 ENC1.4 ENC1.5 LS1.3 LS1.4 LS2.3 LS2.4 MH1.0 MH2.0 MH3.0 MH4.0 S1.2 S1.3 SV1.4 SV1.5 SV2.4 U1.5 U2.2 U2.3 U2.4 U2.16 U2.17 U2.20 U2.21 U2.22 U2.23 U2.24 U2.25 U2.26 U2.27 U2.28 U2.30 U2.33 U2.35 U2.37 U2.38 U2.39 U2.40 U2.42 U2.43 U2.45 U2.50 U2.53 U2.55 U2.56 U2.57 U2.58 U2.59 U2.60 Y1.4
copper on no net: | length 0.5
  Top Layer w10: 1186.69,-873.67 1187.04,-874.02

## Polygon pours and split planes (outlines as drawn)
GND on Bottom Layer "Bottom Layer-GND" (solid, pour order 6): 0,0 2480.32,0 2480.32,-1968.5 0,-1968.5
no net on Bottom Layer "Bottom Layer-No Net" (solid, pour order 4): 98.43,-78.74
+3V3 on Bottom Layer "bot3v3" (solid, pour order 2): 1011.69,-1223.21 1011.69,-1658.21 476.69,-1658.21 476.69,-1223.21
+3V3 on Top Layer "top3v3" (solid, pour order 0): 1006.69,-1651.71 1006.69,-1233.21 481.69,-1233.21 481.69,-1651.71

## Keep-outs
Keep-Out Layer:
  lines w47.24: -23.62,-1968.5 ccw(c0,-1968.5) 0,-1992.13 ; -23.62,-1968.5 ccw(c0,-1968.5) 0,-1992.13 ; -23.62,-1968.5 -23.62,0 ; -23.62,0 cw(c0,0) 0,23.62 ; -23.62,0 cw(c0,0) 0,23.62 ; 0,-1992.13 2480.31,-1992.13 ; 0,23.62 2480.31,23.62 ; 2480.31,-1992.13 ccw(c2480.31,-1968.5) 2503.94,-1968.5 ; 2480.31,-1992.13 ccw(c2480.31,-1968.5) 2503.94,-1968.5 ; 2480.31,23.62 cw(c2480.31,0) 2503.94,0 ; 2480.31,23.62 cw(c2480.31,0) 2503.94,0 ; 2503.94,-1968.5 2503.94,0

## Silkscreen, mask and mechanical layers (free items; w line width, h text height)
Top Overlay:
  text "Gimbal Board 2019_Rev_1 M.Zhang & E.Hou" at 314.96,-78.74 h50

## Text inside footprints (layer, text, board x,y; h text height)
P1: Top Overlay "TX" at 1745.67,-258.19 h40 r270; Top Overlay "RX" at 1643.31,-258.19 h40 r270; Top Overlay "RTS" at 1537.01,-229.57 h40 r270; Top Overlay "IO" at 1745.67,-557.32 h40 r270; Top Overlay "CLK" at 1643.31,-553.39 h40 r270; Top Overlay "RST" at 1544.09,-557.32 h40 r270; Top Overlay "VCC" at 1848.03,-226.61 h40 r270; Top Overlay "GND" at 1844.09,-557.32 h40 r270